# EAGLE board JD-RangeFinder (1) (EAGLE 9.6.2)
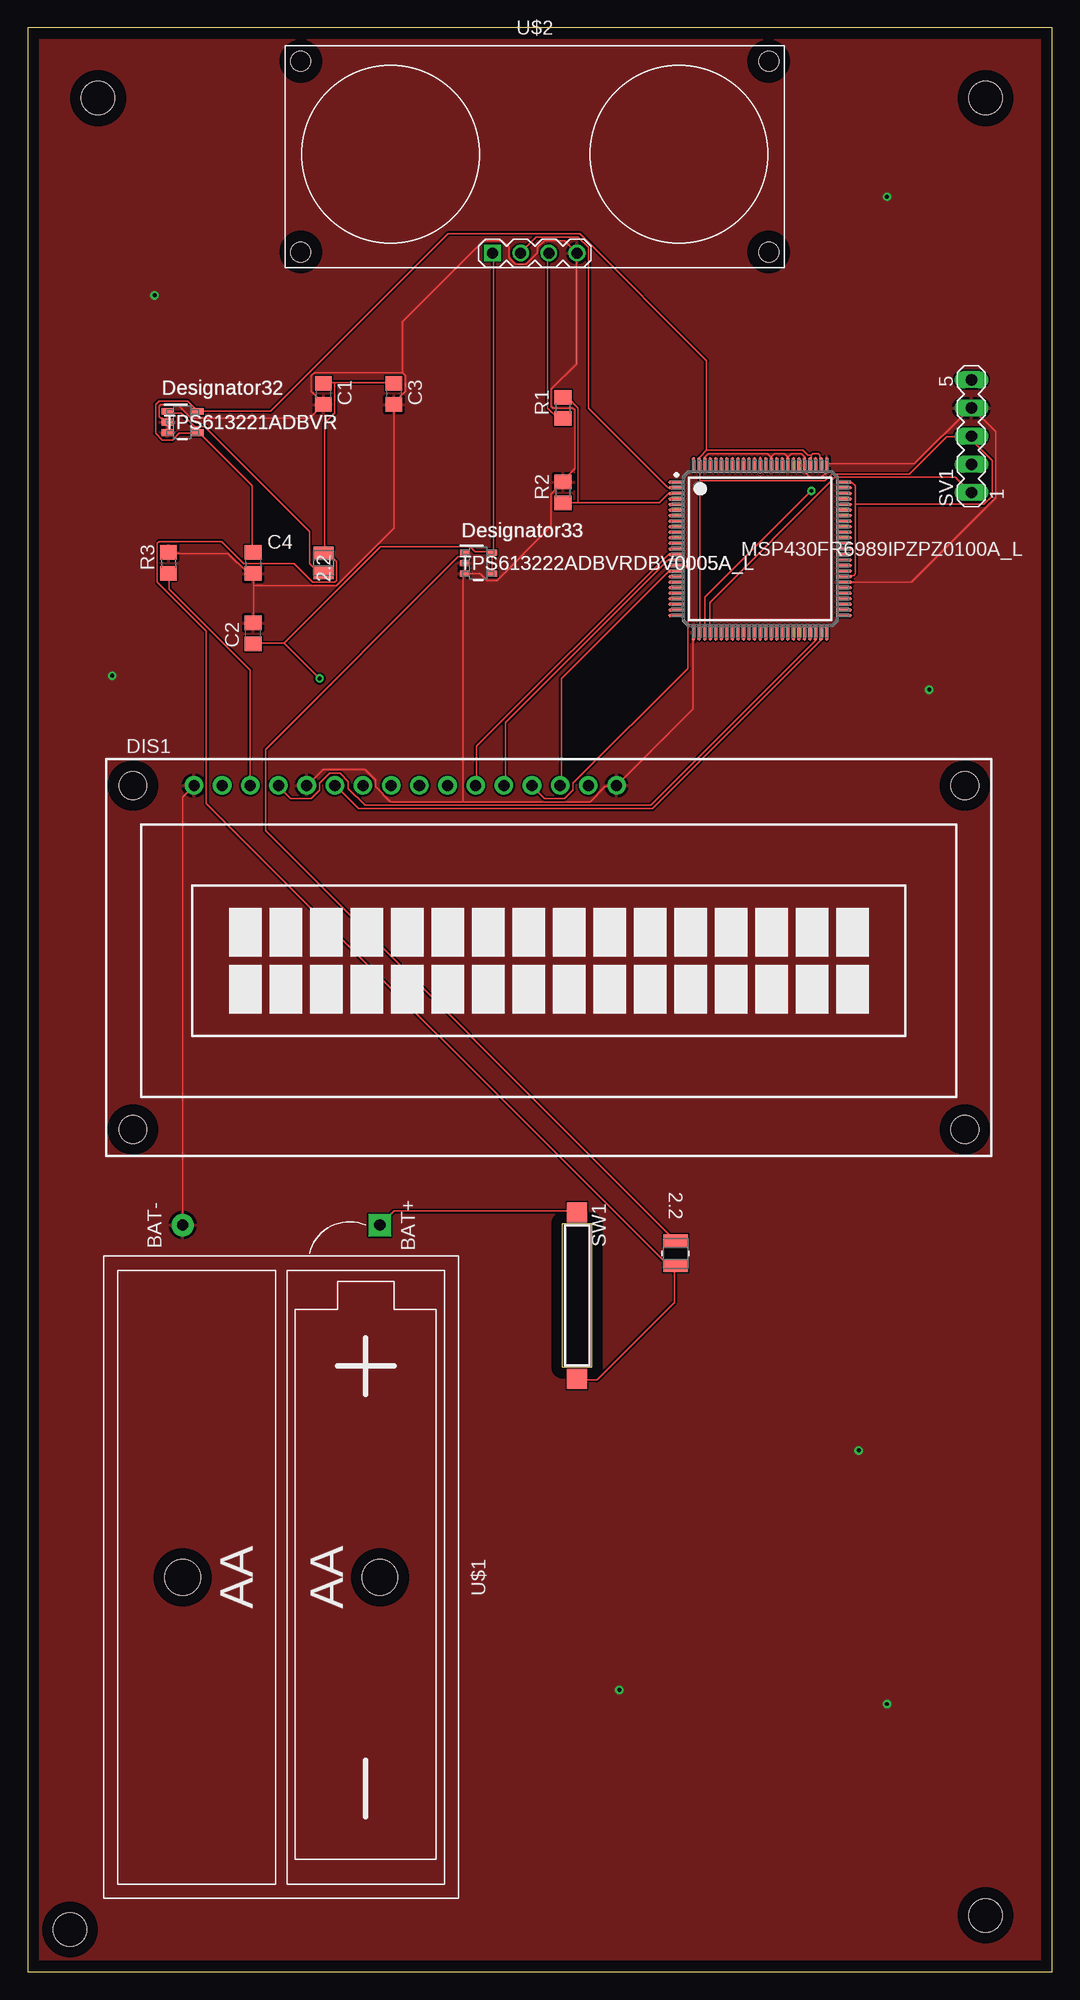
[diagram p0: board, top side]
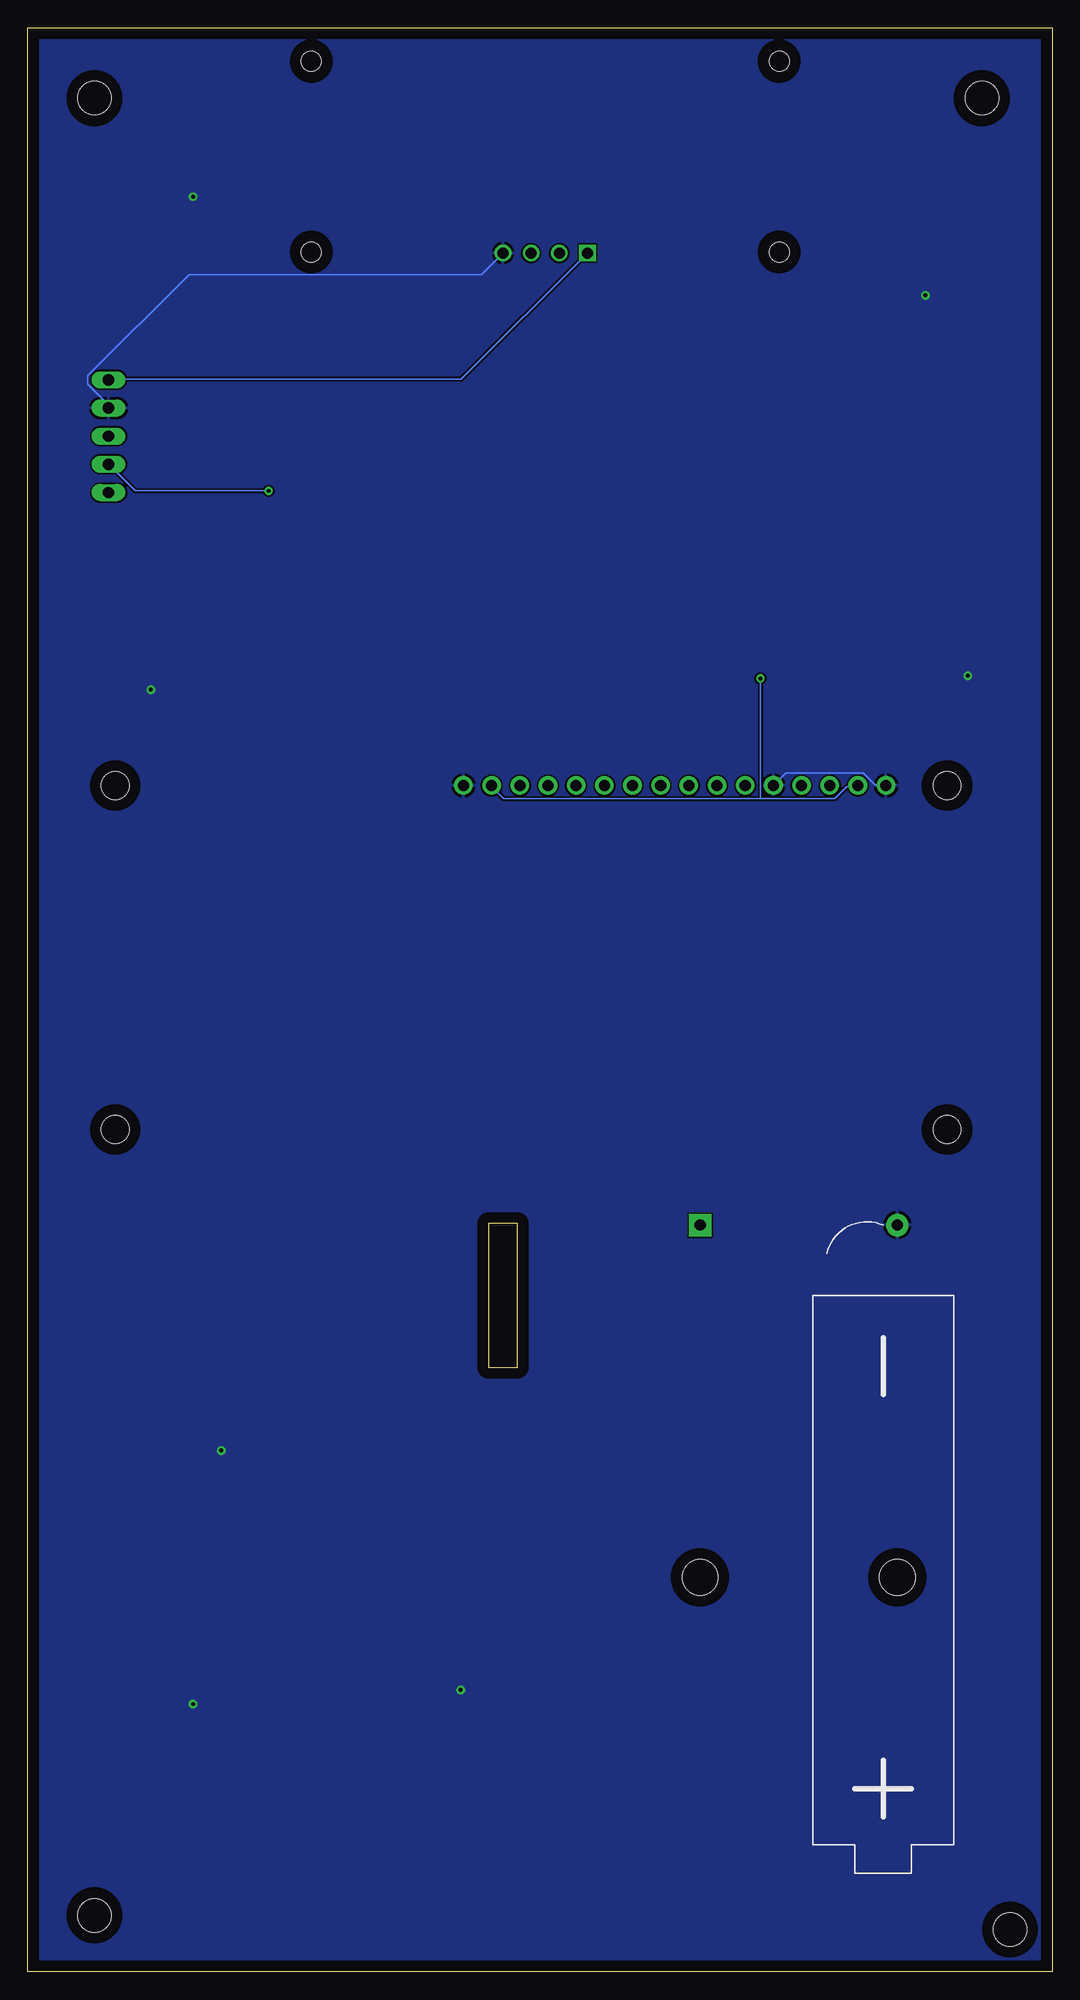
[diagram p1: board, bottom side, seen from below]

Size 92.38 x 175.25 mm. Coordinates in mm from the lower left corner, seen from the top.
Outline: 0,0 92.38,0 92.38,175.25 0,175.25 0,0
Copper layers (1*16): Top 0.035mm / dielectric 1.5mm / Bottom 0.035mm
Design rules "default": minimum track width 6mil, minimum drill 0.35mm, track to track 6mil, track to pad 6mil, pad to pad 6mil, via to via 6mil, smd to smd 6mil, copper to edge 40mil, drill to drill 6mil, minimum pad ring 10mil, minimum via ring 8mil, stop-mask expansion 4mil, vias tented up to drill 0mil, thermal gap 10mil
Holes 3 mm at 6.35,168.91 86.36,168.91 86.36,5.08 3.81,3.81

## Footprints (pad centres in the part's own frame; a part is rotated, then mirrored left to right if it is on the bottom)
C0805 = smd 1.3 x 1.5: 1 -0.95,0; 2 0.95,0
TUXGR_16X2_R2 = drill 1 pad 1.676: 1 -32,15.5; 2 -29.46,15.5; 3 -26.92,15.5; 4 -24.38,15.5; 5 -21.84,15.5; 6 -19.3,15.5; 7 -16.76,15.5; 8 -14.22,15.5; 9 -11.68,15.5; 10 -9.14,15.5; 11 -6.6,15.5; 12 -4.06,15.5; 13 -1.52,15.5; 14 1.02,15.5; 15 3.56,15.5; 16 6.1,15.5 | hole 2.5: -37.5,-15.5; 37.5,-15.5; -37.5,15.5; 37.5,15.5
IND_LQM2HPN2R2MG0L_MUR = smd 1.168 x 2.21: 1 -1.118,0; 2 1.118,0
IND_1286AS-H-2R2M=P2_MUR = smd 1.168 x 1.803: 1 -0.876,0; 2 0.876,0
R0805 = smd 1.3 x 1.5: 1 -0.95,0; 2 0.95,0
MA05-1 = drill 1.016 long: 1 -5.08,0; 2 -2.54,0; 3 0,0; 4 2.54,0; 5 5.08,0
CT10-XXXX-A2 = smd 1.8 x 1.8: 1 -7.5,0; 2 7.5,0
PZ0100A_L = smd 1.5 x 0.25: 1 -7.55,6; 2 -7.55,5.5; 3 -7.55,5; 4 -7.55,4.5; 5 -7.55,4; 6 -7.55,3.5; 7 -7.55,3; 8 -7.55,2.5; 9 -7.55,2; 10 -7.55,1.5; 11 -7.55,1; 12 -7.55,0.5; 13 -7.55,0; 14 -7.55,-0.5; 15 -7.55,-1; 16 -7.55,-1.5; 17 -7.55,-2; 18 -7.55,-2.5; 19 -7.55,-3; 20 -7.55,-3.5; 21 -7.55,-4; 22 -7.55,-4.5; 23 -7.55,-5; 24 -7.55,-5.5; 25 -7.55,-6; 51 7.55,-6; 52 7.55,-5.5; 53 7.55,-5; 54 7.55,-4.5; 55 7.55,-4; 56 7.55,-3.5; 57 7.55,-3; 58 7.55,-2.5; 59 7.55,-2; 60 7.55,-1.5; 61 7.55,-1; 62 7.55,-0.5; 63 7.55,0; 64 7.55,0.5; 65 7.55,1; 66 7.55,1.5; 67 7.55,2; 68 7.55,2.5; 69 7.55,3; 70 7.55,3.5; 71 7.55,4; 72 7.55,4.5; 73 7.55,5; 74 7.55,5.5; 75 7.55,6 | smd 0.25 x 1.5: 26 -6,-7.55; 27 -5.5,-7.55; 28 -5,-7.55; 29 -4.5,-7.55; 30 -4,-7.55; 31 -3.5,-7.55; 32 -3,-7.55; 33 -2.5,-7.55; 34 -2,-7.55; 35 -1.5,-7.55; 36 -1,-7.55; 37 -0.5,-7.55; 38 0,-7.55; 39 0.5,-7.55; 40 1,-7.55; 41 1.5,-7.55; 42 2,-7.55; 43 2.5,-7.55; 44 3,-7.55; 45 3.5,-7.55; 46 4,-7.55; 47 4.5,-7.55; 48 5,-7.55; 49 5.5,-7.55; 50 6,-7.55; 76 6,7.55; 77 5.5,7.55; 78 5,7.55; 79 4.5,7.55; 80 4,7.55; 81 3.5,7.55; 82 3,7.55; 83 2.5,7.55; 84 2,7.55; 85 1.5,7.55; 86 1,7.55; 87 0.5,7.55; 88 0,7.55; 89 -0.5,7.55; 90 -1,7.55; 91 -1.5,7.55; 92 -2,7.55; 93 -2.5,7.55; 94 -3,7.55; 95 -3.5,7.55; 96 -4,7.55; 97 -4.5,7.55; 98 -5,7.55; 99 -5.5,7.55; 100 -6,7.55
DBV0005A_L = smd 0.8 x 0.55: 1 -1.275,0.95; 2 -1.275,0; 3 -1.275,-0.95; 4 1.275,-0.95; 5 1.275,0.95
DBV0005A_N = smd 1 x 0.6: 1 -1.375,0.95; 2 -1.375,0; 3 -1.375,-0.95; 4 1.375,-0.95; 5 1.375,0.95
BATTERY-HOLDER-2AA = drill 1 pad 2 square: BAT+ -31.75,8.89 | drill 1 pad 2: BAT- -31.75,-8.89 | hole 3.2: 0,8.89; 0,-8.89
ULTRASONIC-HC-SR04 = drill 1 square: 1 -3.81,-8.89 | drill 1: 2 -1.27,-8.89; 3 1.27,-8.89; 4 3.81,-8.89 | hole 1.8: -21.1,8.4; -21.1,-8.8; 21.1,-8.8; 21.1,8.4

## Placement (x,y rotation side)
C1  4.7  [C0805]  26.67,142.24 270 top
C2  22  [C0805]  20.32,120.65 90 top
C3  4.7  [C0805]  33.02,142.24 270 top
C4  22  [C0805]  20.32,127 270 top
DIS1  TUXGR_16X2_R2  [TUXGR_16X2_R2]  46.99,91.44 0 top
L1  2.2  [IND_LQM2HPN2R2MG0L_MUR]  58.42,64.77 270 top
L2  2.2  [IND_1286AS-H-2R2M=P2_MUR]  26.67,127 90 top
R1  1k  [R0805]  48.26,140.97 90 top
R2  2k  [R0805]  48.26,133.35 90 top
R3  1K  [R0805]  12.7,127 90 top
SV1  [MA05-1]  85.09,138.43 90 top
SW1  CT10-XXXX-A2  [CT10-XXXX-A2]  49.53,60.96 270 top
U1  MSP430FR6989IPZPZ0100A_L  [PZ0100A_L]  66.04,128.27 0 top
U2  TPS613222ADBVRDBV0005A_L  [DBV0005A_L]  40.64,127 0 top
U3  TPS613221ADBVR  [DBV0005A_N]  13.97,139.7 0 top
U$1  BATTERY-HOLDER-2AA  [BATTERY-HOLDER-2AA]  22.86,35.56 270 top
U$2  ULTRASONIC-HC-SR04  [ULTRASONIC-HC-SR04]  45.72,163.83 0 top

## Library data of the parts
C1 C3 = rcl; MF: YAGEO; MPN: RC0201FR-074K7L; OC_NEWARK: 25T1360; SPICEPREFIX: C
C2 C4 = rcl; MF: CORNELL DUBILIER; MPN: 225P15492XD3; OC_NEWARK: 65W8197; SPICEPREFIX: C
DIS1 = display-lcd; OC_FARNELL: unknown; OC_NEWARK: unknown
L1 = JD-RangeFinder; COPYRIGHT: Copyright (C) 2022 Ultra Librarian. All rights reserved.; MANUFACTURER_PART_NUMBER: LQM2HPN2R2MG0L; MF: MULTICOMP PRO; MFR_NAME: Murata; MPN: MCNP100V225M6.3X11; OC_NEWARK: 13M5143
L2 = JD-RangeFinder; COPYRIGHT: Copyright (C) 2022 Ultra Librarian. All rights reserved.; MANUFACTURER_PART_NUMBER: 1286AS-H-2R2M=P2; MF: MULTICOMP PRO; MFR_NAME: Murata; MPN: MCNP100V225M6.3X11; OC_NEWARK: 13M5143
R1 R3 = rcl; MF: TT ELECTRONICS / WELWYN; MPN: MFR4-1K0FI; OC_NEWARK: 97K4809; SPICEPREFIX: R
R2 = rcl; MF: YAGEO; MPN: RC0805FR-072KL; OC_NEWARK: 82AH8291; SPICEPREFIX: R
SV1 = con-lstb; OC_FARNELL: unknown; OC_NEWARK: unknown
SW1 = switch-coto; MF: COTO TECHNOLOGY; MPN: CT10-1540-A2; OC_NEWARK: 38H9447
U1 = JD-RangeFinder; COPYRIGHT: Copyright (C) 2022 Ultra Librarian. All rights reserved.; MANUFACTURER_PART_NUMBER: MSP430FR6989IPZ; MFR_NAME: Texas Instruments; OC_NEWARK: unknown; REFDES: RefDes; TYPE: TYPE
U2 = JD-RangeFinder; COPYRIGHT: Copyright (C) 2022 Ultra Librarian. All rights reserved.; MANUFACTURER_PART_NUMBER: TPS613222ADBVR; MFR_NAME: Texas Instruments; OC_NEWARK: unknown; REFDES: RefDes; TYPE: TYPE
U3 = JD-RangeFinder; COPYRIGHT: Copyright (C) 2022 Ultra Librarian. All rights reserved.; MANUFACTURER_PART_NUMBER: TPS613221ADBVR; MFR_NAME: Texas Instruments; OC_NEWARK: unknown; REFDES: RefDes; TYPE: TYPE
U$1 = diy-modules; MF: MULTICOMP PRO; MPN: MP000349; OC_NEWARK: 07AH4363
U$2 = diy-modules; MF: SEEED STUDIO; MPN: 101020010; OC_NEWARK: 29AK9688

## Nets
3.3V_OUTPUT: C4.1 SV1.3 U1.27 U1.58 U1.75 U1.77 U1.79 U1.99 U3.4 U3.5
5V_OUTPUT: C2.1 DIS1.2 DIS1.15 SV1.5 U2.4 U2.5 U$2.1
BAT_PLUS_OUTPUT: C1.1 C3.1 L1.2 L2.2 SW1.2
GND: C1.2 C2.2 C3.2 C4.2 DIS1.1 DIS1.5 DIS1.16 R2.2 R3.2 SV1.4 U1.26 U1.57 U1.76 U1.80 U1.83 U1.86 U1.98 U2.2 U2.3 U3.2 U3.3 U$1.BAT- U$2.4
N$1: R1.1 U$2.3
N$2: L2.1 U3.1
N$3: SW1.1 U$1.BAT+
N$4: DIS1.3 R3.1
N$8: L1.1 U2.1
P1.4: U1.2 U$2.2
P1.5: R1.2 R2.1 U1.3
P2.2: DIS1.6 U1.49
P2.3: DIS1.4 U1.48
P2.4: DIS1.11 U1.14
P2.5: DIS1.12 U1.15
P2.6: DIS1.13 U1.16
P2.7: DIS1.14 U1.17
RST: SV1.1 U1.29
TST: SV1.2 U1.28

## Tracks (layer width: path | path; a pad name or v marks a point on that pad's centre or on a via)
3.3V_OUTPUT
  Top 0.152: 74.62,132.28 74.62,133.96 74.32,134.26 73.71,134.26 U1.75 | 74.62,132.28 74.62,126.03 74.47,125.88 73.71,125.88 U1.58 | 74.62,132.28 86.21,132.28 86.97,133.05 86.97,136.25 85.14,138.07 85.14,138.38 SV1.3 84.99,138.38 82.85,138.38 79.5,135.03 72.49,135.03 71.88,134.42 60.6,134.42 | C4.1 20.22,128.02 20.22,133.96 15.49,138.68 U3.4 15.34,138.68 13.66,138.68 13.06,138.07 12.14,138.07 11.53,138.68 11.53,141.28 11.84,141.58 14.43,141.58 15.34,140.66 U3.5 15.49,140.66 21.89,140.66 37.9,156.67 49.78,156.67 61.21,145.24 61.21,137.16 | 70.66,136.7 70.66,135.94 U1.79 | 70.66,136.7 70.81,136.85 71.27,136.85 71.42,136.7 71.42,135.94 U1.77 | 60.6,134.42 60.6,135.79 U1.99 60.6,135.94 60.6,136.55 61.21,137.16 | 60.6,134.42 60.6,120.85 U1.27 | 70.66,136.7 70.36,136.7 69.9,137.16 61.21,137.16
5V_OUTPUT  (via drill 0.35)
  Top 0.152: U2.4 41.86,126.19 41.86,127.86 U2.5 | 23.11,119.79 31.8,128.47 39.88,128.47 40.34,128.02 41.86,128.02 U2.5 | 23.11,119.79 20.37,119.79 C2.1 | U$2.1 42.01,154.84 42.01,128.02 U2.5 | 23.11,119.79 v26.31,116.59
  Bottom 0.152: 26.31,105.77 49.48,105.77 50.55,106.83 DIS1.15 | 26.31,105.77 19.61,105.77 18.54,106.83 17.63,106.83 DIS1.2 | U$2.1 53.29,143.56 84.99,143.56 SV1.5 | v26.31,116.59 26.31,105.77
BAT_PLUS_OUTPUT
  Top 0.152: SW1.2 49.63,53.34 51.31,53.34 58.32,60.35 58.32,63.55 L1.2 58.32,63.7 57.71,63.7 16.1,105.31 16.1,120.85 11.68,125.27 11.68,128.78 11.84,128.93 17.48,128.93 19.46,126.95 24.03,126.95 25.7,125.27 27.69,125.27 27.84,125.42 27.84,127.1 26.77,128.17 | 27.69,143.26 33.02,143.26 C3.1 | 27.69,143.26 26.77,143.26 C1.1 | 26.77,128.17 26.77,139.6 27.69,140.51 27.69,143.26 | 26.77,128.17 26.77,128.02 L2.2 26.77,128.17
GND  (via drill 0.35)
  Top 0.152: 67,136.55 66.7,136.85 61.37,136.85 61.06,136.55 61.06,135.94 U1.98 | 67,136.55 67,135.94 U1.86 67,136.55 | 68.53,136.55 68.53,135.94 U1.83 68.53,136.55 | 68.53,136.55 68.22,136.85 67.31,136.85 67,136.55 | 68.53,136.55 68.83,136.85 69.75,136.85 70.05,136.55 70.05,135.94 U1.80 70.05,135.79 70.05,135.18 70.51,134.72 71.58,134.72 72.03,135.18 72.03,135.79 U1.76 72.03,135.94 79.96,135.94 84.99,140.97 SV1.4 85.14,140.97 87.27,138.84 87.27,132.89 79.65,125.27 73.71,125.27 U1.57 | 20.37,124.97 20.37,126.03 C4.2 20.22,126.19 19.76,126.19 18.09,127.86 12.75,127.86 R3.2 | 20.37,124.97 20.37,121.61 C2.2 | U3.3 12.6,138.84 12.6,139.6 U3.2 12.45,139.75 12.14,140.06 11.99,140.06 11.84,140.21 11.84,141.12 11.99,141.28 13.51,141.28 14.73,140.06 25.4,140.06 26.62,141.28 C1.2 26.62,141.43 25.55,142.49 25.55,143.87 25.86,144.17 33.78,144.17 | 33.78,144.17 34.09,143.87 34.09,142.49 33.02,141.43 C3.2 33.02,130.15 27.84,124.97 20.37,124.97 | U2.3 39.42,126.19 39.42,126.95 U2.2 | U2.3 39.42,126.03 40.79,126.03 41.4,125.42 42.32,125.42 47.19,130.3 47.19,133.2 48.26,134.26 R2.2 48.26,134.42 49.33,135.48 49.33,140.82 49.17,140.97 47.35,140.97 47.19,141.12 47.19,142.65 49.48,144.93 49.48,154.84 U$2.4 48.41,156.06 46.58,156.06 45.97,155.45 45.97,154.99 44.91,153.92 43.99,153.92 43.38,154.53 43.38,155.45 42.77,156.06 41.1,156.06 33.78,148.74 33.78,144.17 | U1.26 60,120.7 60,113.84 53.14,106.98 DIS1.16 52.98,106.83 52.07,106.83 50.7,105.46 39.27,105.46 | U$1.BAT- 13.97,105.92 14.88,106.83 DIS1.1 | 39.27,105.46 32.72,105.46 31.34,106.83 31.34,107.44 30.43,108.36 26.62,108.36 25.25,106.98 DIS1.5
  Top 0.152: 39.27,105.46 39.27,126.03 U2.3
  Bottom 0.152: DIS1.1 15.04,106.98 15.95,106.98 17.02,108.05 24.03,108.05 25.09,106.98 DIS1.5 | U$2.4 51.46,153.01 77.83,153.01 86.97,143.87 86.97,143.1 85.14,141.28 85.14,140.97 SV1.4
  other vias: 7.62,116.84 11.43,151.13 77.47,160.02 81.28,115.57 74.93,46.99 53.34,25.4 77.47,24.13
  pour Top: -5.08,180.34 97.79,180.34 97.79,-6.35 -6.35,-6.35 -6.35,180.34
  pour Bottom: -5.08,179.07 96.52,179.07 96.52,-5.08 -5.08,-5.08
N$1
  Top 0.152: R1.1 48.26,140.06 47.8,140.06 46.89,140.97 46.89,154.84 U$2.3
N$2
  Top 0.152: U3.1 12.6,140.51 13.82,140.51 15.04,139.29 15.95,139.29 25.4,129.84 25.4,126.95 26.16,126.19 26.62,126.19 L2.1
N$3
  Top 0.152: U$1.BAT+ 33.02,68.58 49.48,68.58 SW1.1
N$4
  Top 0.152: R3.1 12.75,126.03 12.75,124.66 20.07,117.35 20.07,106.98 DIS1.3
N$8
  Top 0.152: L1.1 21.44,102.87 21.44,110.18 38.81,127.56 38.96,127.56 39.27,127.86 U2.1
P1.4
  Top 0.152: U1.2 58.47,133.81 57.71,133.81 50.55,140.97 50.55,155.45 49.63,156.36 45.82,156.36 44.45,154.99 U$2.2
P1.5
  Top 0.152: 49.63,132.44 56.95,132.44 57.71,133.2 58.47,133.2 U1.3 | 49.63,132.44 48.26,132.44 R2.1 | 49.63,132.44 49.63,140.97 48.72,141.88 48.26,141.88 R1.2
P2.2
  Top 0.152: U1.49 71.42,120.7 71.42,119.94 56.34,104.85 29.82,104.85 27.84,106.83 DIS1.6
P2.3
  Top 0.152: U1.48 70.97,120.7 70.97,119.94 56.19,105.16 30.43,105.16 28.91,106.68 28.91,107.29 28.14,108.05 27.23,108.05 26.31,107.14 26.31,106.53 25.55,105.77 23.72,105.77 22.66,106.83 DIS1.4
P2.4
  Top 0.152: U1.14 58.47,127.71 57.71,127.71 40.49,110.49 40.49,106.98 DIS1.11
P2.5
  Top 0.152: U1.15 58.47,127.25 57.71,127.25 43.08,112.62 43.08,106.98 DIS1.12
P2.6
  Top 0.152: U1.16 58.62,126.8 59.23,126.8 59.54,126.49 59.54,117.5 49.17,107.14 49.17,106.53 48.41,105.77 46.58,105.77 45.52,106.83 DIS1.13
P2.7
  Top 0.152: U1.17 58.47,126.19 57.71,126.19 48.11,116.59 48.11,106.98 DIS1.14
RST
  Top 0.152: U1.29 61.52,120.85 61.52,123.44 72.8,134.72 83.62,134.72 84.99,133.35 SV1.1
TST  (via drill 0.35)
  Top 0.152: v70.66,133.5 61.06,123.9 61.06,120.85 U1.28
  Bottom 0.152: v70.66,133.5 82.7,133.5 SV1.2